# EAGLE board pi (EAGLE 9.6.2)

Size 160 x 100 mm. Coordinates in mm from the lower left corner, seen from the top.
Outline: 0,0 160,0 160,100 0,100 0,0
Copper layers (1*16): Top 0.035mm / dielectric 1.5mm / Bottom 0.035mm
Design rules "default": minimum track width 6mil, minimum drill 0.35mm, track to track 6mil, track to pad 6mil, pad to pad 6mil, via to via 6mil, smd to smd 6mil, copper to edge 40mil, drill to drill 6mil, minimum pad ring 10mil, minimum via ring 8mil, stop-mask expansion 4mil, vias tented up to drill 0mil, thermal gap 10mil

## Footprints (pad centres in the part's own frame; a part is rotated, then mirrored left to right if it is on the bottom)
MODULE_RASPBERRY_PI_4B_4GB = drill 1.016 square: 1 -34.13,23.23 | drill 1.016: 2 -34.13,25.77; 3 -31.59,23.23; 4 -31.59,25.77; 5 -29.05,23.23; 6 -29.05,25.77; 7 -26.51,23.23; 8 -26.51,25.77; 9 -23.97,23.23; 10 -23.97,25.77; 11 -21.43,23.23; 12 -21.43,25.77; 13 -18.89,23.23; 14 -18.89,25.77; 15 -16.35,23.23; 16 -16.35,25.77; 17 -13.81,23.23; 18 -13.81,25.77; 19 -11.27,23.23; 20 -11.27,25.77; 21 -8.73,23.23; 22 -8.73,25.77; 23 -6.19,23.23; 24 -6.19,25.77; 25 -3.65,23.23; 26 -3.65,25.77; 27 -1.11,23.23; 28 -1.11,25.77; 29 1.43,23.23; 30 1.43,25.77; 31 3.97,23.23; 32 3.97,25.77; 33 6.51,23.23; 34 6.51,25.77; 35 9.05,23.23; 36 9.05,25.77; 37 11.59,23.23; 38 11.59,25.77; 39 14.13,23.23; 40 14.13,25.77; 41 20.23,17.107; 42 20.23,19.647; 43 17.69,17.107; 44 17.69,19.647 | drill 2.75 pad 6.2: S1 -39,24.5; S2 19,24.5; S3 19,-24.5; S4 -39,-24.5
SOP50P490X110-10N = smd 1.47 x 0.28: 1 -2.15,1; 2 -2.15,0.5; 3 -2.15,0; 4 -2.15,-0.5; 5 -2.15,-1; 6 2.15,-1; 7 2.15,-0.5; 8 2.15,0; 9 2.15,0.5; 10 2.15,1
SOIC127P600X175-16N = smd 1.97 x 0.6: 1 -2.475,4.445; 2 -2.475,3.175; 3 -2.475,1.905; 4 -2.475,0.635; 5 -2.475,-0.635; 6 -2.475,-1.905; 7 -2.475,-3.175; 8 -2.475,-4.445; 9 2.475,-4.445; 10 2.475,-3.175; 11 2.475,-1.905; 12 2.475,-0.635; 13 2.475,0.635; 14 2.475,1.905; 15 2.475,3.175; 16 2.475,4.445

## Placement (x,y rotation side)
U1  RASPBERRY_PI_4B_4GB  [MODULE_RASPBERRY_PI_4B_4GB]  -58.42,33.02 0 top  (outside the outline)
U6  TMUX1204DGSR  [SOP50P490X110-10N]  5.08,85.09 180 top
U7  TMUX1204DGSR  [SOP50P490X110-10N]  5.08,77.47 0 top
U8  TMUX1204DGSR  [SOP50P490X110-10N]  6.35,67.31 0 top
U9  TCA9546ADR  [SOIC127P600X175-16N]  8.89,93.98 90 top

## Library data of the parts
U1 = RASPBERRY_PI_4B_4GB; AVAILABILITY: Not in stock; CHECK_PRICES: https://www.snapeda.com/parts/RASPBERRY%20PI%204B/4GB/Raspberry+Pi/view-part/?ref=eda; DESCRIPTION: BCM2711 Raspberry Pi 4 Model B 4GB - ARM® Cortex®-A72 MPU Embedded Evaluation Board; MF: Raspberry Pi; MP: RASPBERRY PI 4B/4GB; PACKAGE: None; PRICE: None; SNAPEDA_LINK: https://www.snapeda.com/parts/RASPBERRY%20PI%204B/4GB/Raspberry+Pi/view-part/?ref=snap
U6-U8 = TMUX1204DGSR; AVAILABILITY: In Stock; CHECK_PRICES: https://www.snapeda.com/parts/TMUX1204DGSR/Texas+Instruments/view-part/?ref=eda; DESCRIPTION: 5-V, 4:1, 1-channel, general-purpose analog multiplexer; MF: Texas Instruments; MP: TMUX1204DGSR; PACKAGE: VSSOP-10 Texas Instruments; PRICE: None; PURCHASE-URL: https://www.snapeda.com/api/url_track_click_mouser/?unipart_id=3657556&manufacturer=Texas Instruments&part_name=TMUX1204DGSR&search_term=tmux1204; SNAPEDA_LINK: https://www.snapeda.com/parts/TMUX1204DGSR/Texas+Instruments/view-part/?ref=snap
U9 = TCA9546ADR; AVAILABILITY: In Stock; CHECK_PRICES: https://www.snapeda.com/parts/TCA9546ADR/Texas+Instruments/view-part/?ref=eda; DESCRIPTION: 4-channel 1.65- to 5.5-V I2C/SMBus switch with reset & voltage translation; MF: Texas Instruments; MP: TCA9546ADR; PACKAGE: SOIC-16 Texas Instruments; PRICE: None; PURCHASE-URL: https://www.snapeda.com/api/url_track_click_mouser/?unipart_id=424331&manufacturer=Texas Instruments&part_name=TCA9546ADR&search_term=None; SNAPEDA_LINK: https://www.snapeda.com/parts/TCA9546ADR/Texas+Instruments/view-part/?ref=snap

## Nets
5V: U1.2 U1.4
+3V3: U1.1 U1.17 U6.5 U6.6 U7.5 U7.6 U8.5 U8.6 U9.16
BCK_ADC: U1.13
CLK_ADC: U1.7
CS0: U1.32 U6.8
CS0_0: U6.2
CS0_1: U6.9
CS0_2: U6.4
CS0_3: U6.7
CS1: U1.33 U8.8
CS1_0: U8.2
CS1_1: U8.9
CS1_2: U8.4
CS1_3: U8.7
CS2: U1.36 U7.8
CS2_0: U7.2
CS2_1: U7.9
CS2_2: U7.4
CS2_3: U7.7
DGND: U1.6 U1.9 U1.14 U1.20 U1.25 U1.30 U1.34 U1.39 U1.S1 U1.S2 U1.S3 U1.S4 U6.3 U7.3 U8.3 U9.1 U9.2 U9.3 U9.8 U9.13
DOUT_ADC: U1.11
EQ0_CE: U1.16
EQ0_CL: U1.22
EQ0_DI: U1.18
EQ1_CE: U1.38
EQ1_CL: U1.37
EQ1_DI: U1.40
LRCK_ADC: U1.12
MUX0: U1.29 U6.1 U7.1 U8.1
MUX1: U1.31 U6.10 U7.10 U8.10
SCK: U1.23
SCL: U1.5 U9.14
SCL_0: U9.5
SCL_1: U9.4
SCL_2: U9.10
SCL_3: U9.9
SDA: U1.3 U9.15
SDA_0: U9.7
SDA_1: U9.6
SDA_2: U9.12
SDA_3: U9.11
SDI/O: U1.19

## Tracks (layer width: path | path; a pad name or v marks a point on that pad's centre or on a via)
5V  (1 unrouted)
+3V3  (8 unrouted)
CS0  (1 unrouted)
CS1  (1 unrouted)
CS2  (1 unrouted)
DGND  (19 unrouted)
MUX0  (3 unrouted)
MUX1  (3 unrouted)
SCL  (1 unrouted)
SDA  (1 unrouted)